# Altium PCB CAN-Junction.PcbDoc
Units mil, origin at the board's own origin, x right, y up, seen from the top; angles counter-clockwise.
Board outline 1653.54 x 826.77 mil, 2 copper layers (Top Layer, Bottom Layer); 3 components, 4 nets, 21 pads, 0 vias.
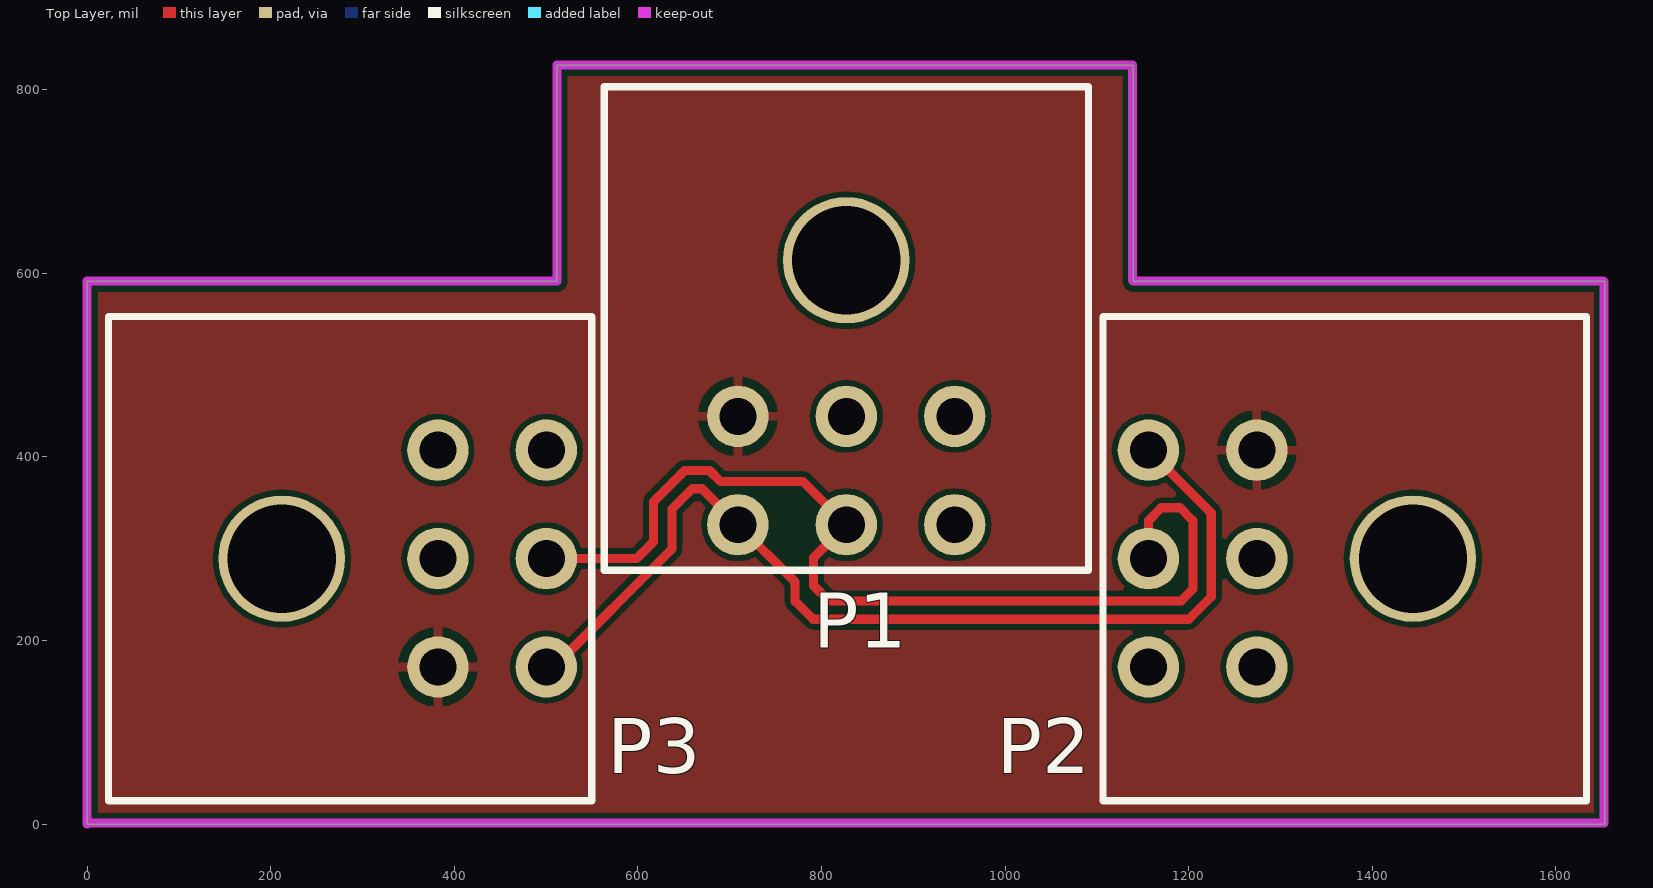
[diagram p0: Top Layer view]
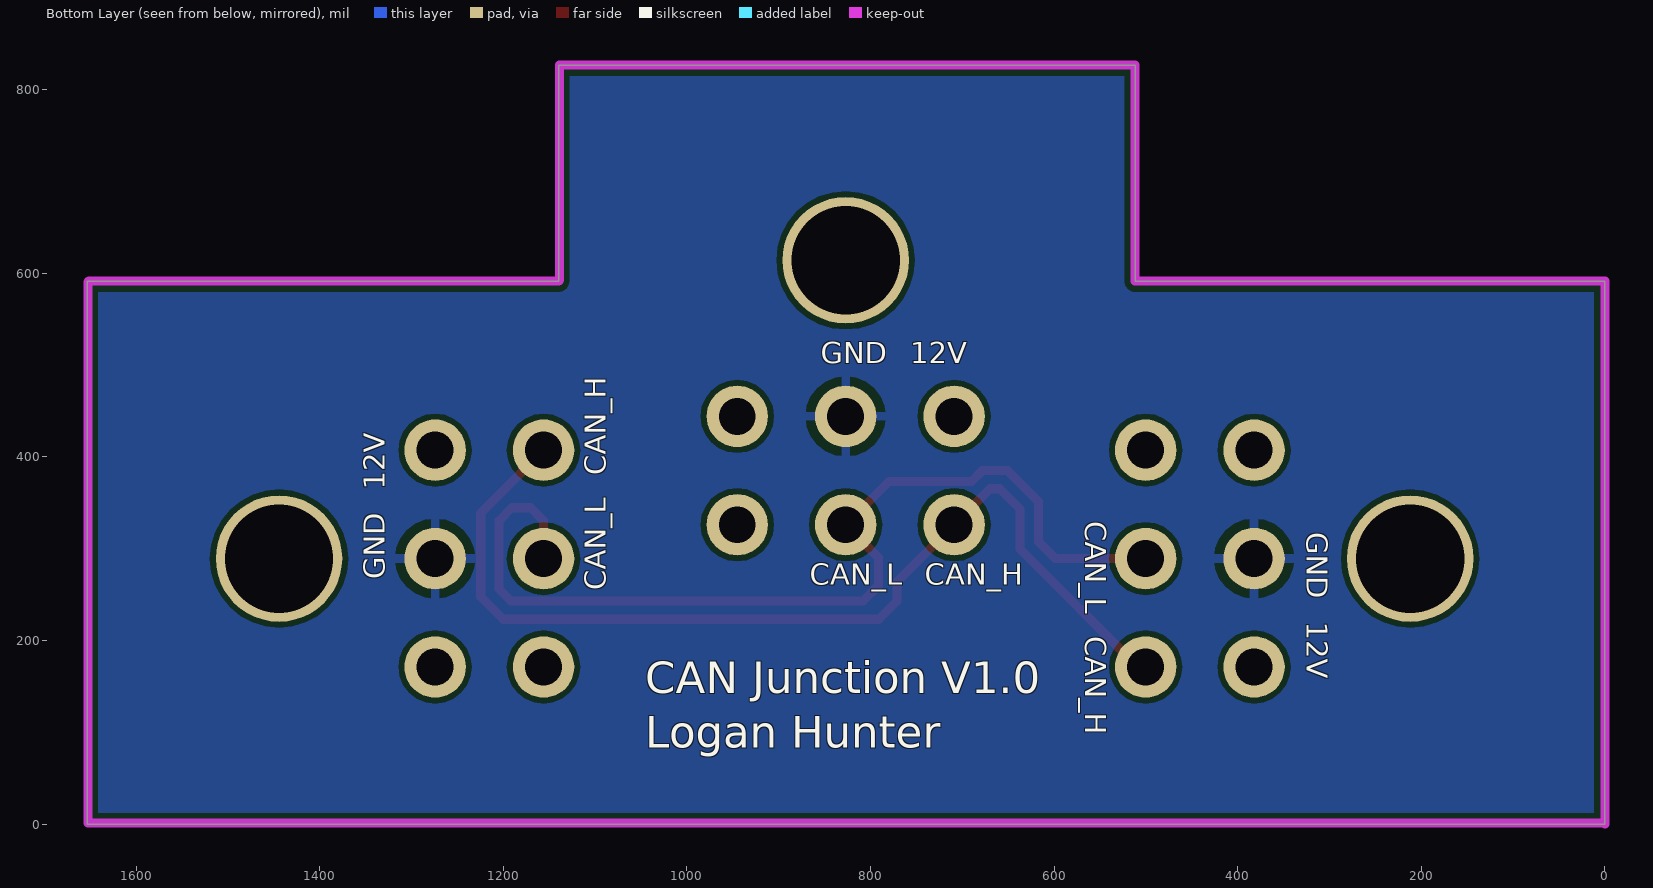
[diagram p1: Bottom Layer view, seen from below]
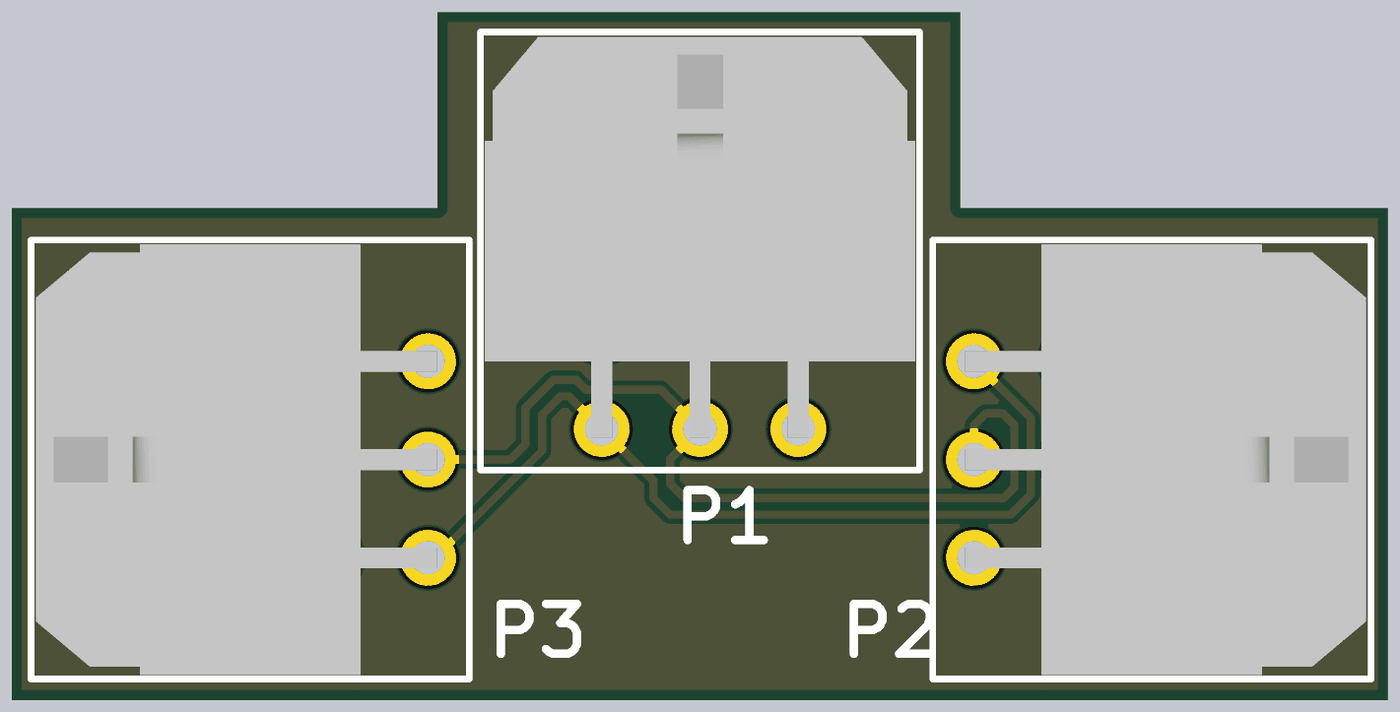
[diagram p2: 3D render of the assembled board from above, using the file's embedded part models]

## Layer stack, top to bottom
Top Solder: solder mask 0.4, Solder Resist, Dk 3.5
Top Layer: signal copper 1.4
Dielectric 1: dielectric 12.6, FR-4, Dk 4.8
Bottom Layer: signal copper 1.4
Bottom Solder: solder mask 0.4, Solder Resist, Dk 3.5

## Board outline
0,0 1653.54,0 1653.54,591.54 1139.76,591.54 1139.76,826.77 511.81,826.77 511.81,591.54 0,591.54

## Design rules (kind name [scope] priority, off if disabled: settings)
BoardOutlineClearance [All] p1: gap=11.81
Clearance [All] p1: gap=6
ComponentClearance [All] p1: gap=3.94 collisioncheckmode=3 verticalgap=10 showdistances=FALSE
DiffPairsRouting [All] p1: maxlimit=10 minlimit=10 mostfreqgap=10 toplayer_minwidth=10 toplayer_maxwidth=30 toplayer_prefwidth=20 bottomlayer_minwidth=10 bottomlayer_maxwidth=30 bottomlayer_prefwidth=20 maxuncoupledlength=500
FabricationTestPointUsage TestPointUsage [All] p1: valid=0 allowmultiple=FALSE
FabricationTestpoint Testpoint [All] p1: side=3 testpointundercomponent=TRUE minsize=40 maxsize=100 preferedsize=60 minholesize=0 maxholesize=40 preferedholesize=32 testpointgrid=1 allowsidetop=TRUE allowsidebottom=TRUE usegrid=TRUE gridtolerance=0.01
HoleSize [All] p1: absolutevalues=TRUE maxlimit=248.03 minlimit=11.81 maxpercent=80.000 minpercent=20.000
HoleToHoleClearance [All] p1: gap=17.72 allowstackedmicrovias=TRUE
MinimumAnnularRing [All] p1: minimumring=5.91
MinimumSolderMaskSliver [All] p1: minsoldermaskwidth=2.95
PlaneClearance [All] p1: clearance=19.68
PlaneConnect [All] p1: planeconnectstyle=Direct reliefexpansion=20 reliefentries=4 reliefconductorwidth=10 reliefairgap=10
PolygonConnect "GND Via" [isVia AND InNet('GND')] p1: connectstyle=Direct reliefconductorwidth=10 reliefentries=4 polygonreliefangle="90 Angle" airgapwidth=10 // GND Via Connection
PolygonConnect [All] p2: connectstyle=Relief reliefconductorwidth=10 reliefentries=4 polygonreliefangle="90 Angle" airgapwidth=9.84
RoutingVias [All] p1: holewidth=11.81 width=23.62 viastyle="Through Hole" minholewidth=11.81 minwidth=23.62 maxholewidth=248.03 maxwidth=259.84
SilkToSilkClearance [All] p1: silktosilkclearance=5.91
SilkToSolderMaskClearance SilkscreenOverComponentPads [IsPad] p1: minsilkscreentomaskgap=9.84 clearancetoexposedcopper=TRUE
SolderMaskExpansion [All] p1: expansion=3.94
Width [All] p1: maxlimit=78.74 minlimit=6 preferedwidth=9.84 minimp=50.000000 maximp=50.000000 favimp=50.000000
19 further rules are at their usual default settings.

## Classes and differential pairs
differential pair CAN: +CAN_P -CAN_N

## Components (designator, comment, footprint, x,y, rotation, side; value= is the part's Value field where it differs from the comment)
P1 "SCH_MLX_MICROFIT_3X2" PCB_MLX_MICROFIT_3X2 212.13,289.17 r270 top
P2 "SCH_MLX_MICROFIT_3X2" PCB_MLX_MICROFIT_3X2 1444.49,289.17 r90 top
P3 "SCH_MLX_MICROFIT_3X2" PCB_MLX_MICROFIT_3X2 827.13,614.17 r180 top

## Footprints (in the part's own frame and the unit in brackets; to place one, negate y for a bottom-side part, rotate by r counter-clockwise, add the part's x,y. Pads: shape width x height; smd on the part's side, far side on the other; paste and mask are expansions set on the pad)
PCB_MLX_MICROFIT_3X2 [mm]
  round 1.7 hole 1.02: 1(3,4.32) 2(0,4.32) 3(-3,4.32) 4(3,7.32) 5(0,7.32) 6(-3,7.32)
  round 3.5 hole 3: ""(0,0)
  silkscreen extent -6.7,-4.8 6.7,8.57, body extent -6.57,-4.65 6.58,7.59, height 8.83

## Nets (pads, with @x,y where several pads share a name; then routed paths per layer and width w, separated by ;. In a path a pad name is that pad's centre, name@x,y a point inside that pad or via, vN(x,y) a via of type N, cw(c..) or ccw(c..) an arc to the next point about the centre after c; other vN are vias at no path point)
12V: P1.1 P2.1 P3.1
CAN_N: P1.5 P2.5 P3.5 | length 1099.2
  Top Layer w10: P1.5 598.49,289.17 617.13,307.81 617.13,351.38 650.91,385.16 678.13,385.16 690.25,373.03 780.08,373.03 P3.5 791.34,290.2 791.34,259.84 808.07,243.11 1191.93,243.11 1204.72,255.9 1204.72,330.57 1190.81,344.49 1170.28,344.49 1156.3,330.51 P2.5
CAN_P: P1.4 P2.4 P3.4 | length 1099.6
  Top Layer w10: P1.4 508.66,171.06 637.13,299.53 637.13,343.09 659.19,365.16 669.84,365.16 P3.4 771.34,263.66 771.34,242.7 790.93,223.11 1200.21,223.11 1224.72,247.62 1224.72,338.86 P2.4
GND: P1.2 P2.2 P3.2
pads on no net: P1. P1.3 P1.6 P2. P2.3 P2.6 P3. P3.3 P3.6

## Polygon pours and split planes (outlines as drawn)
GND on Bottom Layer "GND_BOTTOM" (solid, remove dead copper, pour order 2): -3.94,826.77 1649.61,826.77 1649.61,0 -3.94,0
12V on Top Layer "PWR_TOP" (solid, remove dead copper, pour order 0): 0,826.77 1653.54,826.77 1653.54,0 0,0

## Keep-outs
Keep-Out Layer:
  lines w10: 0,0 0.98,0.98 1652.56,0.98 1652.56,590.55 1651.57,591.54 1139.76,591.54 1138.78,592.52 1138.78,826.77 511.81,826.77 511.81,591.54 0,591.54 0,0

## Silkscreen, mask and mechanical layers (free items; w line width, h text height)
Bottom Overlay:
  text "12V" at 756.89,494.09 h39.37
  text "GND" at 854.33,494.09 h39.37
  text "CAN_H" at 1080.71,379.92 h39.37 r270
  text "12V" at 1321.85,364.17 h39.37 r270
  text "CAN_L" at 573.82,329.72 h39.37 r90
  text "GND" at 332.68,317.91 h39.37 r90
  text "GND" at 1321.85,266.73 h39.37 r270
  text "CAN_L" at 1080.71,254.92 h39.37 r270
  text "CAN_H" at 741.14,252.95 h39.37
  text "CAN_L" at 866.14,252.95 h39.37
  text "12V" at 332.68,220.47 h39.37 r90
  text "CAN_H" at 573.82,204.72 h39.37 r90
  text "CAN Junction V1.0 / Logan Hunter" at 1045.28,71.85 h59.06